# Altium PCB ShieldBBGaliV.PcbDoc
Units mm, origin at the board's own origin, x right, y up, seen from the top; angles counter-clockwise.
Board outline 75.9 x 64.8 mm, 2 copper layers (Component Side, Bottom Layer), stack 0.325 mm thick; 18 components, 22 nets, 38 pads, 0 vias.
Unrouted connection lines stored in the file: 21.
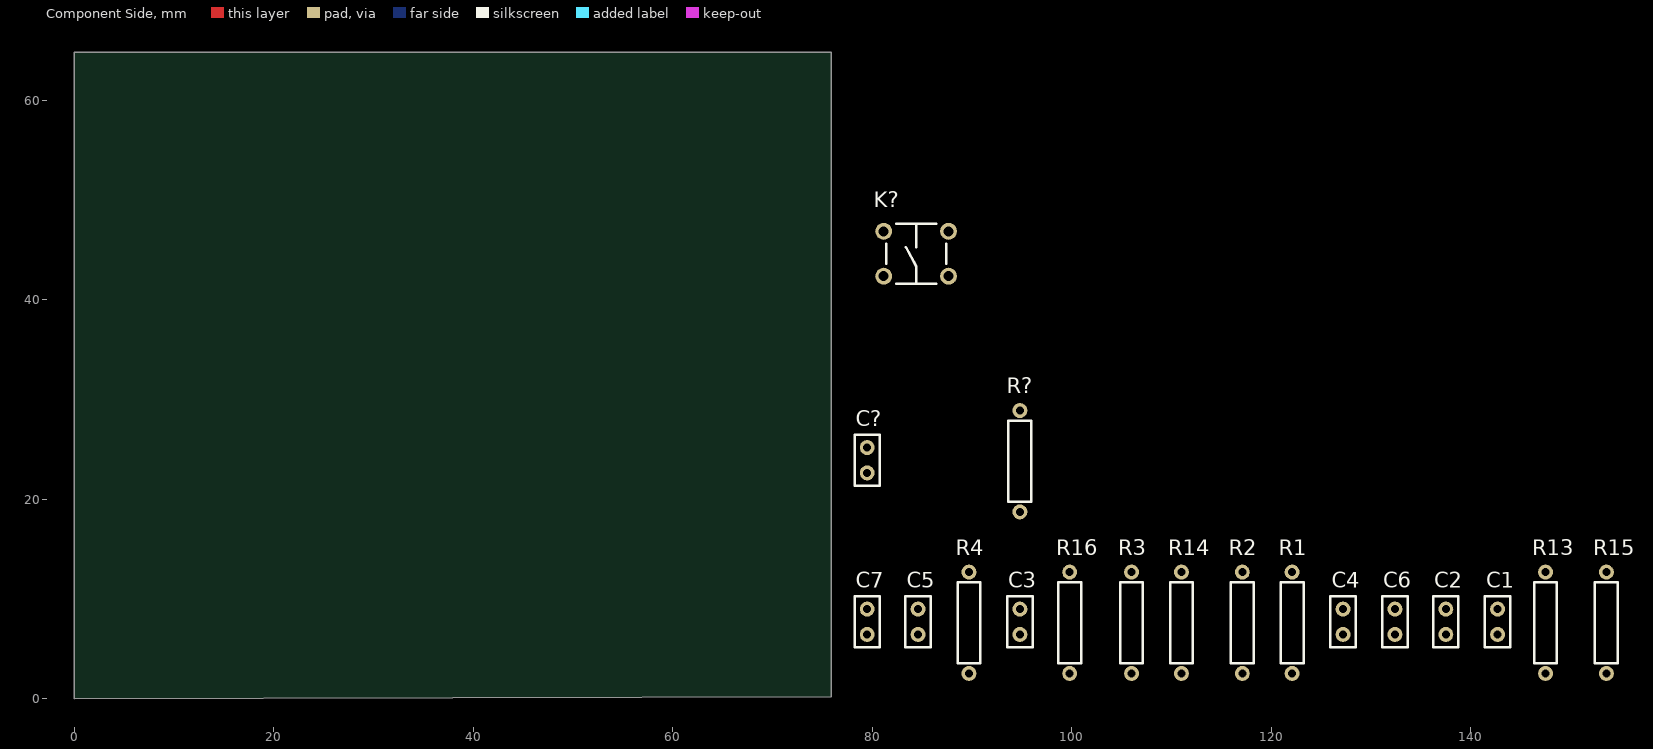
[diagram p0: Component Side view]
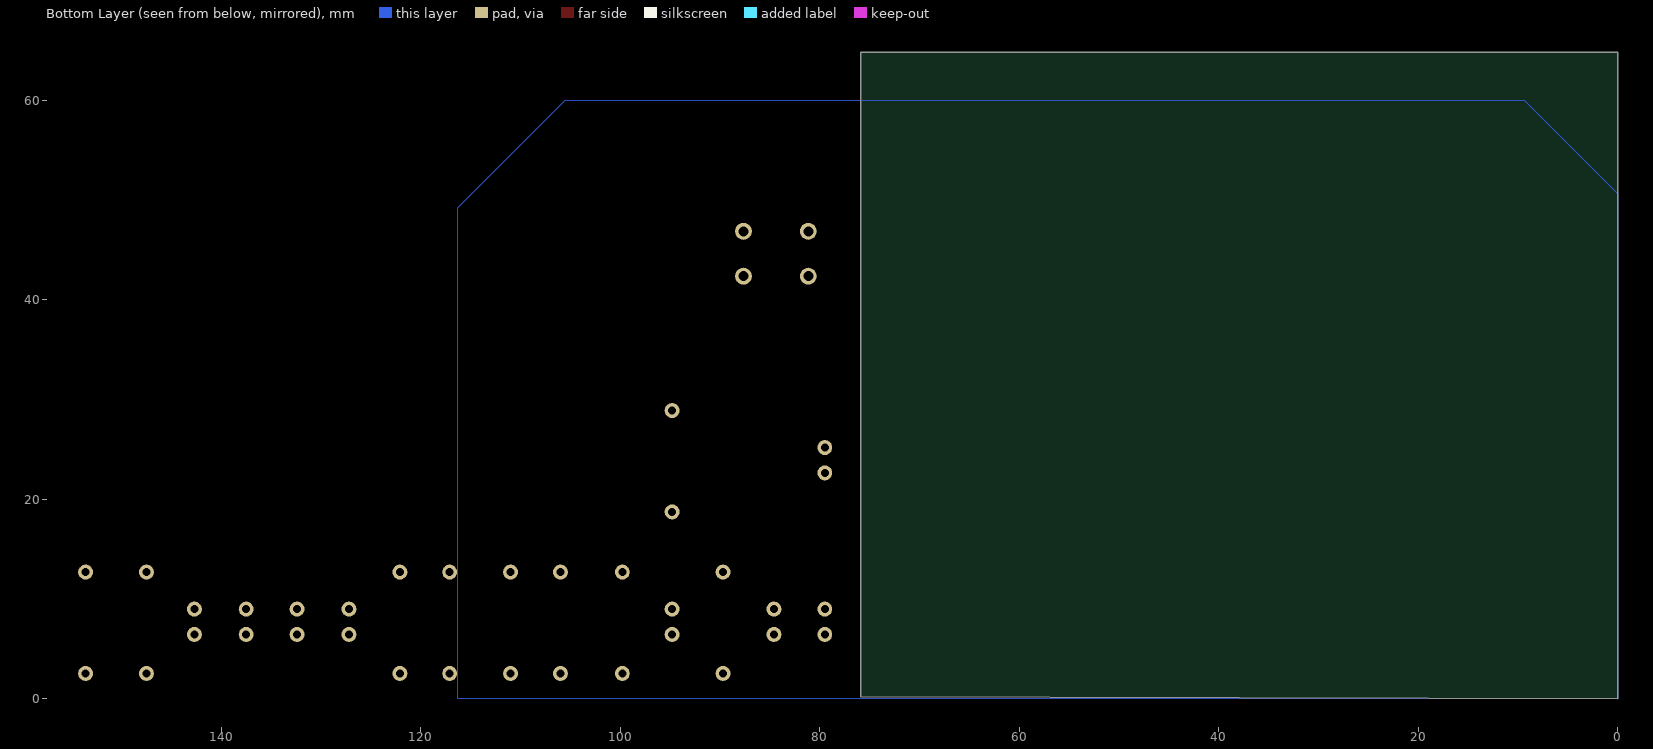
[diagram p1: Bottom Layer view, seen from below]

## Layer stack, top to bottom
Top Solder: solder mask 0.0102, Solder Resist, Dk 3.5
Component Side: signal copper 0.0356
Dielectric 1: core 0.254, FR-4, Dk 4.2
Bottom Layer: signal copper 0.0356
Solder Side: solder mask 0.0102, Solder Resist, Dk 3.5

## Board outline
0,0 0,64.8 73.9,64.8 75.9,64.8 75.9,0.2

## Design rules (kind name [scope] priority, off if disabled: settings)
Clearance Clearance_brd [IsKeepOut] p1: gap=0.4
Clearance Clearance_plane [InNamedPolygon('GND') vs IsPad] p2: gap=0.01
Clearance Clearance_plane_1 [InNamedPolygon('GND') vs IsNet] p3: gap=0.5
Clearance [All] p4: gap=0.2
ComponentClearance [All] p1: gap=0.2 collisioncheckmode=3 verticalgap=0.1 showdistances=FALSE
Height [All] p1: minheight=0 maxheight=35 prefheight=12.7
HoleSize [All] p1: absolutevalues=TRUE maxlimit=6 minlimit=0.25 maxpercent=80.000 minpercent=20.000
HoleToHoleClearance [All] p1: gap=0.6 allowstackedmicrovias=TRUE
MinimumSolderMaskSliver [All] p1: minsoldermaskwidth=0.075
PlaneClearance [All] p1: clearance=1
PlaneConnect [All] p1: planeconnectstyle=Direct reliefexpansion=0.508 reliefentries=4 reliefconductorwidth=0.254 reliefairgap=0.254
PolygonConnect [All] p1: connectstyle=Direct reliefconductorwidth=0.254 reliefentries=4 polygonreliefangle="90 Angle" airgapwidth=0.254
RoutingVias [All] p1: holewidth=0.25 width=0.6 viastyle="Through Hole" minholewidth=0.2 minwidth=0.6 maxholewidth=0.3 maxwidth=0.9
SilkToSilkClearance [All] p1: silktosilkclearance=0.1
SilkToSolderMaskClearance [IsPad] p1: minsilkscreentomaskgap=0.1 clearancetoexposedcopper=TRUE
SolderMaskExpansion [All] p1: expansion=0.102
Width [All] p1: maxlimit=3 minlimit=0.2 preferedwidth=0.5
21 further rules are at their usual default settings.

## Classes and differential pairs
component class Arduino: C? K? R?

## Components (designator, comment, footprint, x,y, rotation, side; value= is the part's Value field where it differs from the comment)
C1 "100n" C_2.54mm 142.7,7.7 r90 top
C2 "100n" C_2.54mm 137.5,7.7 r90 top
C3 "100n" C_2.54mm 94.8,7.7 r90 top
C4 "100n" C_2.54mm 127.2,7.7 r90 top
C5 "100n" C_2.54mm 84.6,7.7 r90 top
C6 "100n" C_2.54mm 132.4,7.7 r90 top
C7 "100n" C_2.54mm 79.5,7.7 r90 top
C? "100n" C_2.54mm 79.5,23.9 r90 top
K? "B3F-1000" B3F-1000 84.4,44.6 r90 top
R1 "10k" R_250mW_trav 122.1,7.6 r90 top
R2 "10k" R_250mW_trav 117.1,7.6 r90 top
R3 "10k" R_250mW_trav 106,7.6 r90 top
R4 "10k" R_250mW_trav 89.7,7.6 r90 top
R13 "10k" R_250mW_trav 147.5,7.6 r90 top
R14 "10k" R_250mW_trav 111,7.6 r90 top
R15 "10k" R_250mW_trav 153.6,7.6 r90 top
R16 "10k" R_250mW_trav 99.8,7.6 r90 top
R? "R_trav" R_250mW_trav 94.8,23.8 r90 top

## Footprints (in the part's own frame and the unit in brackets; to place one, negate y for a bottom-side part, rotate by r counter-clockwise, add the part's x,y. Pads: shape width x height; smd on the part's side, far side on the other; paste and mask are expansions set on the pad)
B3F-1000 [mm]
  round 1.7 hole 1: 1(-2.25,-3.25) 2(2.25,-3.25) 3(-2.25,3.25) 4(2.25,3.25)
  silkscreen extent -3,-3 3,3, body extent -3,-3.85 3,3.85, height 4.3
C_2.54mm [mm]
  round 1.5 hole 0.8: 1(-1.27,0) 2(1.27,0)
  silkscreen extent -2.54,-1.27 2.54,1.27, body extent -2.54,-1.27 2.54,1.27, height 4
R_250mW_trav [mm]
  round 1.5 hole 0.8: 1(-5.08,0) 2(5.08,0)
  silkscreen extent -4.06,-1.14 4.06,1.14, body extent -5.35,-1.14 5.35,1.19, height 2.37

## Part data
C1 C2 C3 C4 C5 C6 C7 C?: library part C
R1 R2 R3 R4 R13 R14 R15 R16: library part R_trav

## Nets (pads, with @x,y where several pads share a name; then routed paths per layer and width w, separated by ;. In a path a pad name is that pad's centre, name@x,y a point inside that pad or via, vN(x,y) a via of type N, cw(c..) or ccw(c..) an arc to the next point about the centre after c; other vN are vias at no path point)
5V: C1.2 C2.2 C3.2 R1.2 R2.2 R3.2 R4.2 R13.1 R14.1 R15.1 R16.1
12V: 
AX12_DATA: R3.1
AX12RX: R4.1
AX12RXEN: R2.1
AX12TX: 
AX12TXEN: R1.1
E1_CHA: 
E1_CHB: 
E1_IDX: 
E2_CHA: 
E2_CHB: 
E2_IDX: 
GND: C1.1 C2.1 C3.1 C4.1 C5.1 C6.1 C7.1 C?.1 K?.2 K?.4
PUSHBUTTON: C?.2 K?.1 K?.3 R?.1
SW1: C4.2 R13.2
SW2: C5.2 R14.2
SW3: C6.2 R15.2
SW4: C7.2 R16.2
VBAT: 
VCARD: 
VCC: R?.2

## Polygon pours and split planes (outlines as drawn)
GND on Bottom Layer "GND" (solid, shelved, pour order 4): 0,50.3 0,0 116.078,0 116.3,0 116.3,49.2 105.5,60 9.4,60 0,50.6